# Altium PCB PCB2.PcbDoc
Units mil, origin at the board's own origin, x right, y up, seen from the top; angles counter-clockwise.
Board outline 6000 x 4000 mil, 2 copper layers (Top Layer, Bottom Layer); 39 components, 38 nets, 173 pads, 0 vias.
Unrouted connection lines stored in the file: 50.
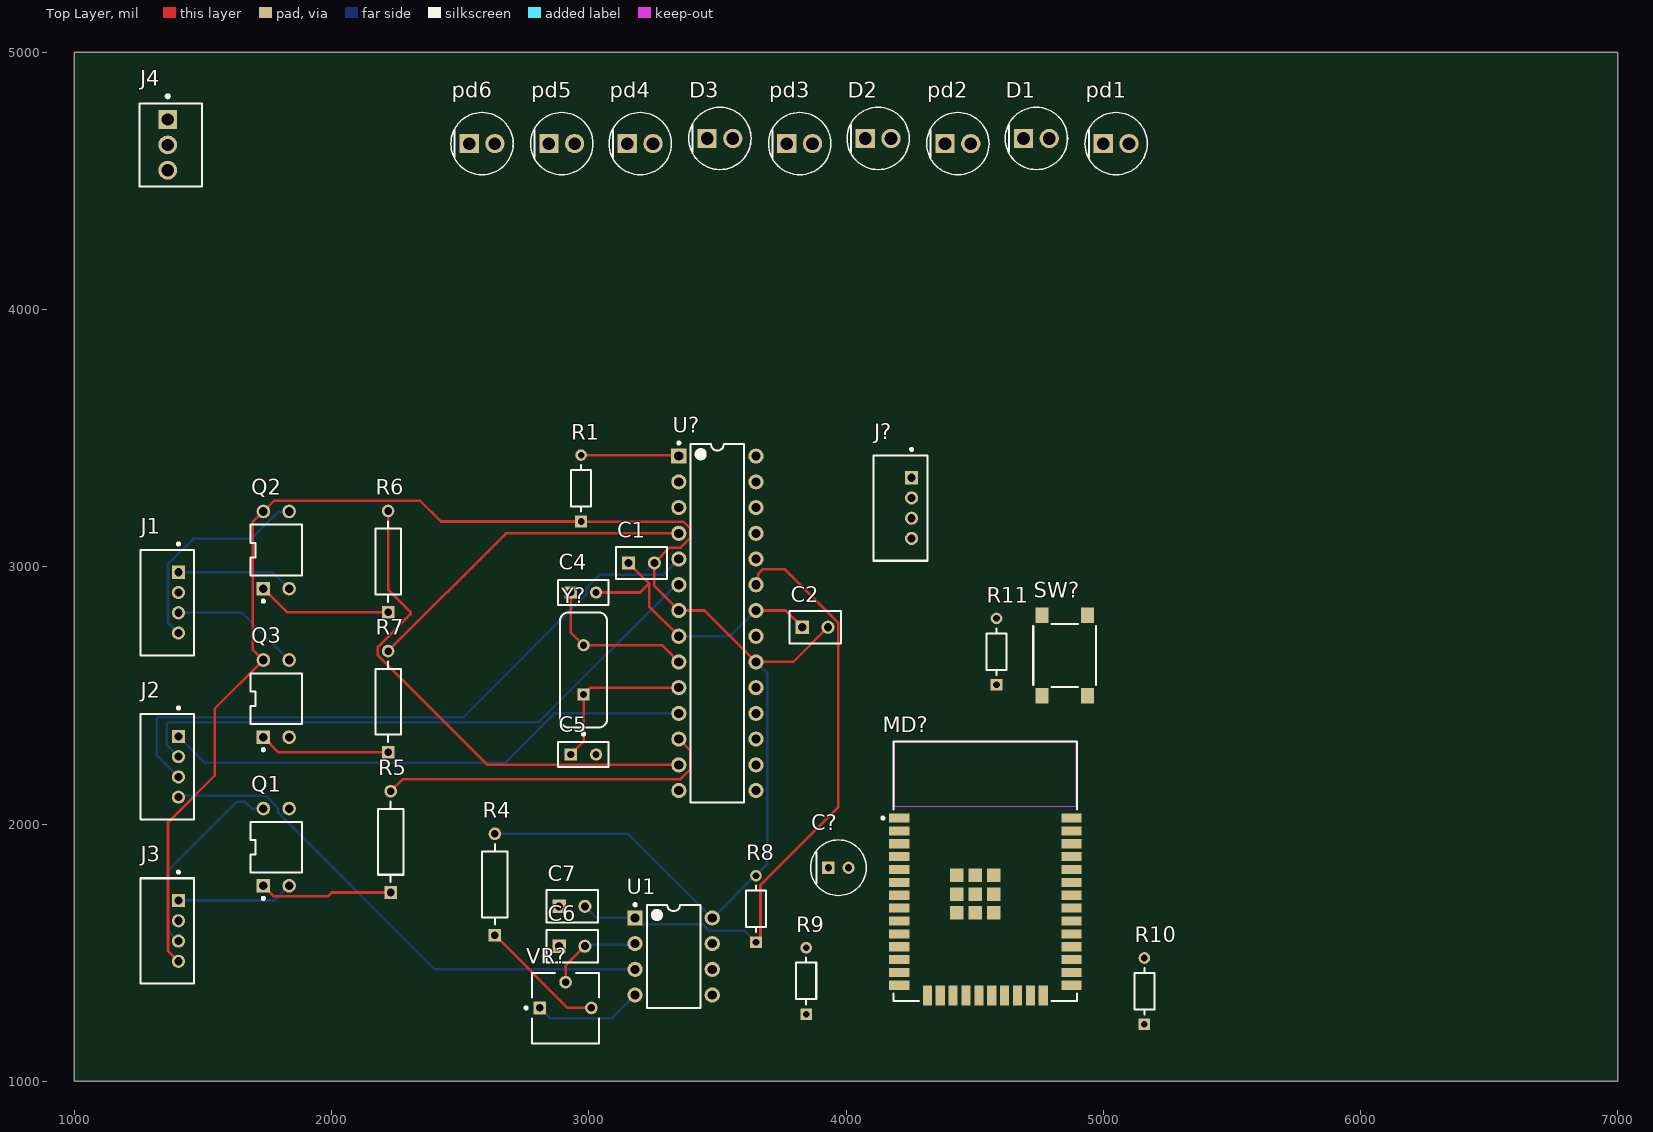
[diagram p0: Top Layer view]
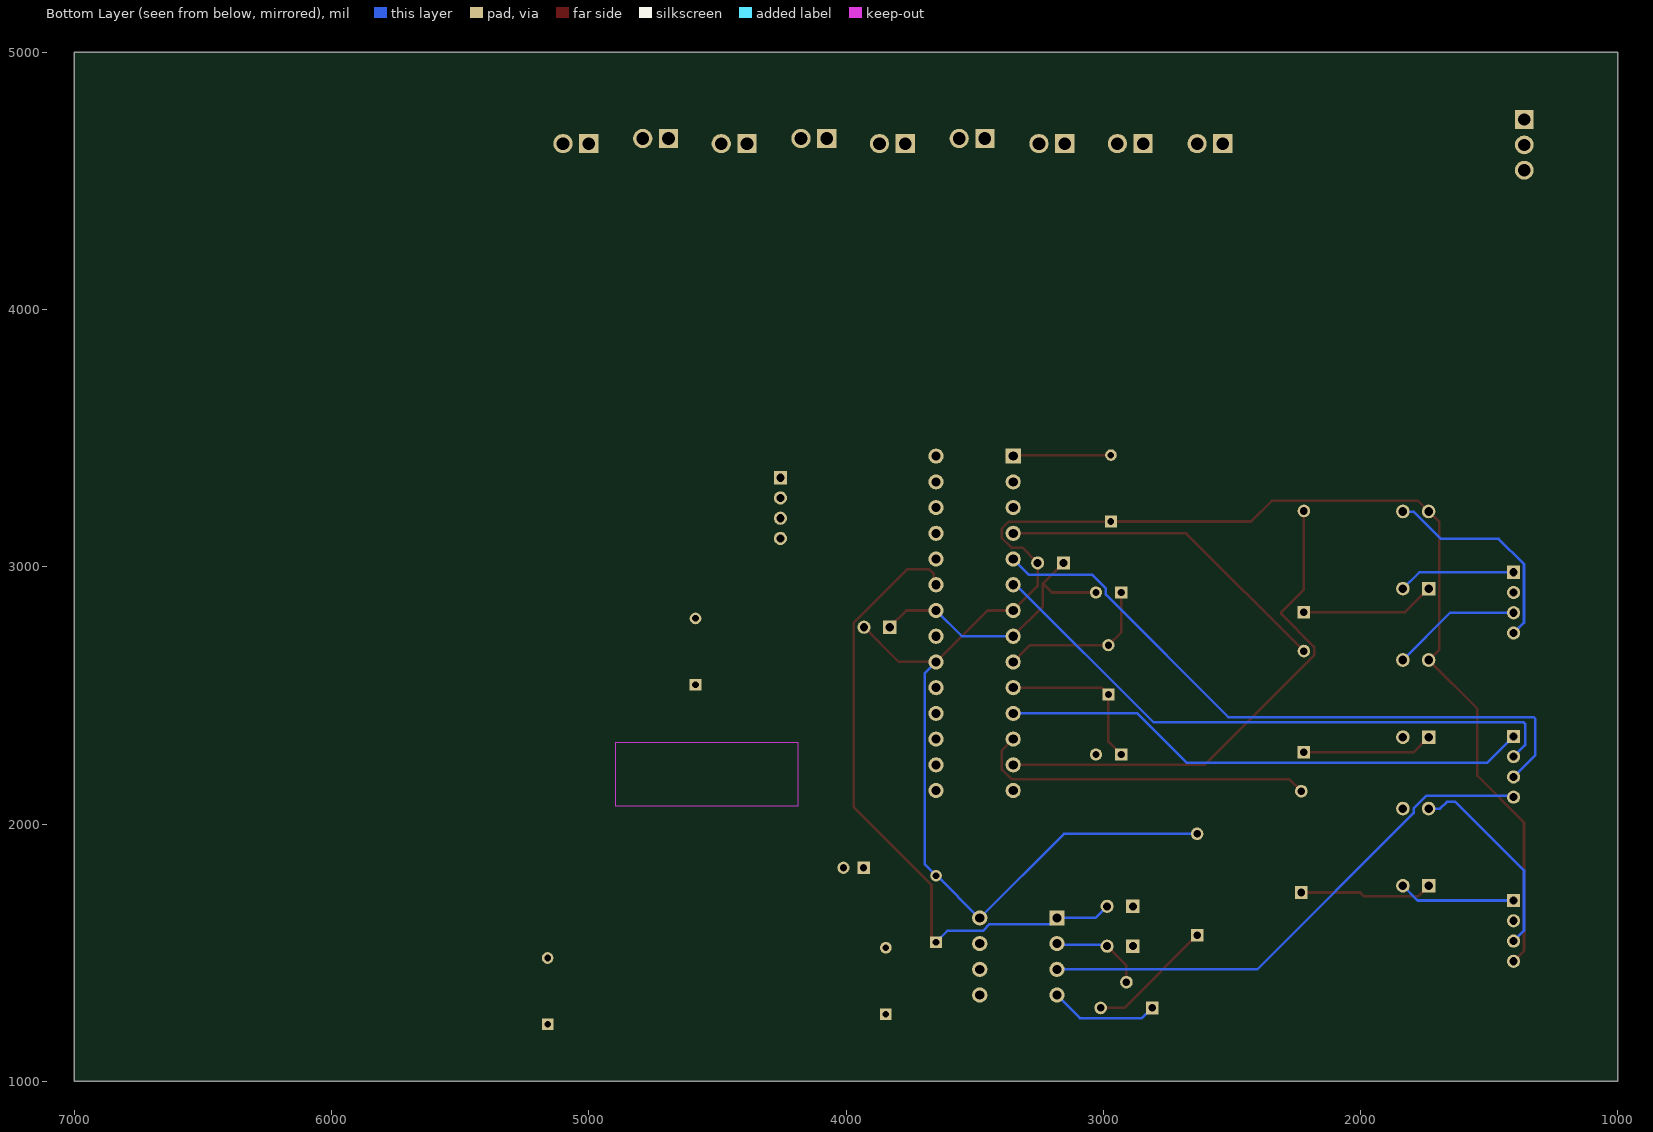
[diagram p1: Bottom Layer view, seen from below]

## Layer stack, top to bottom
Top Solder: solder mask 0.4, Solder Resist, Dk 3.5
Top Layer: signal copper 1.4
Dielectric 1: dielectric 12.6, FR-4, Dk 4.8
Bottom Layer: signal copper 1.4
Bottom Solder: solder mask 0.4, Solder Resist, Dk 3.5

## Board outline
1000,1000 7000,1000 7000,5000 1000,5000

## Design rules (kind name [scope] priority, off if disabled: settings)
Clearance [All] p1: gap=10 ignorepadtopadclearanceinfootprint=FALSE
PolygonConnect [All] p1: connectstyle=Relief reliefconductorwidth=10 reliefentries=4 polygonreliefangle="90 Angle" airgapwidth=10
RoutingVias [All] p1: holewidth=28 width=50 viastyle="Through Hole" minholewidth=28 minwidth=50 maxholewidth=28 maxwidth=50
SolderMaskExpansion [All] p1: expansion=4 istentingtop=FALSE
Width [All] p1: maxlimit=10 minlimit=10 preferedwidth=10
30 further rules are at their usual default settings.

## Classes and differential pairs
component class esp32: C? J? MD? R9 R10 R11 SW?
component class atmega: C1 C2 C4 C5 C6 C7 J1 J2 J3 Q1 Q2 Q3 R1 R4 R5 R6 R7 R8 U1 U? VR? Y?
component class ir: D1 D2 D3 J4 pd1 pd2 pd3 pd4 pd5 pd6

## Components (designator, comment, footprint, x,y, rotation, side; value= is the part's Value field where it differs from the comment)
C1 "C320C104K5R5TA" CAPR51-254-508X318X736 3205,3015 r0 top
C2 "C320C104K5R5TA" CAPR51-254-508X318X736 3880,2765 r0 top
C4 "RDE5C1H220J0S1H03A" FP-RDE0P1-MFG 2979.21,2900 r0 top
C5 "RDE5C1H220J0S1H03A" FP-RDE0P1-MFG 2979.21,2270 r0 top
C6 "C320C104K5R5TA" CAPR51-254-508X318X736 2935,1525 r0 top
C7 "C320C104K5R5TA" CAPR51-254-508X318X736 2935,1680 r0 top
C? "ECA1JM100" FP-RAD-TH-D_5_0_5-L_11_1-MFG 3970.63,1830 r0 top
D1 "LTL2P3KGKNN" FP-LTL2P3KGKNN-MFG 4740,4665 r0 top
D2 "LTL2P3KGKNN" FP-LTL2P3KGKNN-MFG 4125,4665 r0 top
D3 "LTL2P3KGKNN" FP-LTL2P3KGKNN-MFG 3510,4665 r0 top
J1 "DF3A-4P-2DSA" FP-DF3A-4P-2DSA-MFG 1361.69,2860.63 r90 top
J2 "DF3A-4P-2DSA" FP-DF3A-4P-2DSA-MFG 1361.69,2222.5 r90 top
J3 "DF3A-4P-2DSA" FP-DF3A-4P-2DSA-MFG 1361.69,1584.37 r90 top
J4 "22-04-1031" FP-22-04-1031-MFG 1375,4640 r90 top
J? "DF3A-4P-2DSA" FP-DF3A-4P-2DSA-MFG 4211.69,3228.11 r90 top
MD? "ESP32-WROOM-32" FP-ESP32-WROOM-32-MFG 4541.61,1815.94 r0 top
pd1 "LTL2P3KGKNN" FP-LTL2P3KGKNN-MFG 5050,4645 r0 top
pd2 "LTL2P3KGKNN" FP-LTL2P3KGKNN-MFG 4435,4645 r0 top
pd3 "LTL2P3KGKNN" FP-LTL2P3KGKNN-MFG 3820,4645 r0 top
pd4 "LTL2P3KGKNN" FP-LTL2P3KGKNN-MFG 3200,4645 r0 top
pd5 "LTL2P3KGKNN" FP-LTL2P3KGKNN-MFG 2895,4645 r0 top
pd6 "LTL2P3KGKNN" FP-LTL2P3KGKNN-MFG 2585,4645 r0 top
Q1 "PC817X1J000F" FP-PC817X1J000F-MFG 1785,1910 r90 top
Q2 "PC817X1J000F" FP-PC817X1J000F-MFG 1785,3065 r90 top
Q3 "PC817X1J000F" FP-PC817X1J000F-MFG 1785,2487.5 r90 top
R1 "CF18JT10K0" FP-CF18-MFG 2970,3305 r90 top value=10kΩ
R4 "MRS25000C1001FCT00" FP-MRS25-MFG 2635,1765 r90 top
R5 "MRS25000C1001FCT00" FP-MRS25-MFG 2230,1930.67 r90 top
R6 "MRS25000C1001FCT00" FP-MRS25-MFG 2220,3020.12 r90 top
R7 "MRS25000C1001FCT00" FP-MRS25-MFG 2220,2475.39 r90 top
R8 "CF18JT10K0" FP-CF18-MFG 3650,1670 r90 top value=10kΩ
R9 "CF18JT10K0" FP-CF18-MFG 3845,1390 r90 top value=10kΩ
R10 "CF18JT10K0" FP-CF18-MFG 5160,1350 r90 top value=10kΩ
R11 "CF18JT10K0" FP-CF18-MFG 4585,2670 r90 top value=10kΩ
SW? "430152043836" WS-TASV_L6W6H4.3_4301x20438x6 4850,2655 r90 top
U1 "LM393N" P0008A 3330,1485 r0 top
U? "ATmega328-PU" 28P3 3500,2780 r0 top
VR? "3362P-1-104LF" BOUR-3362P 2910,1283.62 r0 top
Y? "FOXSLF/160-20" FOX-FOXSLF160-20 2980,2598.94 r90 top

## Footprints (in the part's own frame and the unit in brackets; to place one, negate y for a bottom-side part, rotate by r counter-clockwise, add the part's x,y. Pads: shape width x height; smd on the part's side, far side on the other; paste and mask are expansions set on the pad)
28P3 [mm] "28-Pin Plastic Dual In-Line Package (PDIP)"
  rect 1.5x1.5 hole 0.9: 1(-3.81,16.51)
  round 1.5 hole 0.9: 2(-3.81,13.97) 3(-3.81,11.43) 4(-3.81,8.89) 5(-3.81,6.35) 6(-3.81,3.81) 7(-3.81,1.27) 8(-3.81,-1.27) 9(-3.81,-3.81) 10(-3.81,-6.35) 11(-3.81,-8.89) 12(-3.81,-11.43) 13(-3.81,-13.97) 14(-3.81,-16.51) 15(3.81,-16.51) 16(3.81,-13.97) 17(3.81,-11.43) 18(3.81,-8.89) 19(3.81,-6.35) 20(3.81,-3.81) 21(3.81,-1.27) 22(3.81,1.27) 23(3.81,3.81) 24(3.81,6.35) 25(3.81,8.89) 26(3.81,11.43) 27(3.81,13.97) 28(3.81,16.51)
  silkscreen extent -3.93,-17.7 2.65,17.93, body extent -3.6,-17.65 3.6,17.65, height 4.58
BOUR-3362P [mm] "THD, 3-Leads, Body 6.6x6.99mm, Pitch 2.54mm"
  rect 1.25x1.25 hole 0.75: 1(-2.54,0.035)
  round 1.25 hole 0.75: 2(0,2.575) 3(2.54,0.035)
  silkscreen extent -4.02,-3.49 3.3,3.5, body extent -3.3,-3.49 3.3,3.49, height 4.95
CAPR51-254-508X318X736 [mm] "THD, 2-Leads, Body 5.08x3.18mm"
  rect 1.3x1.3 hole 0.8: 1(-1.27,0)
  round 1.3 hole 0.8: 2(1.27,0)
  silkscreen extent -2.54,-1.59 2.54,1.59, body extent -2.54,-1.59 2.54,1.59, height 7.36
FOX-FOXSLF160-20 [mm] "THD, 2-Leads, Body 11.35x4.65mm"
  rect 1.2x1.2 hole 0.7: 1(-2.44,0)
  round 1.2 hole 0.7: 2(2.44,0)
  silkscreen extent -6.45,-2.32 5.68,2.32, body extent -5.67,-2.32 5.68,2.33, height 3.6
FP-22-04-1031-MFG [mm]
  rect 1.85x1.85 hole 1.2 paste-2539.97 mask+0: 1(2.5,0.3)
  round 1.85 hole 1.2 paste-2539.97 mask+0: 2(0,0.3) 3(-2.5,0.3)
  silkscreen extent -4.1,-3.1 4.95,3.1, body extent -4.2,-3.2 4.2,3.2, height 0.25
FP-CF18-MFG [mm]
  rect 1.15x1.15 hole 0.65 paste-2539.97 mask+0: 1(-3.28,0)
  round 1.15 hole 0.65 paste-2539.97 mask+0: 2(3.28,0)
  silkscreen extent -2.3,-1 2.3,1, body extent -3.96,-1.1 3.96,1.1, height 0.25
FP-DF3A-4P-2DSA-MFG [mm]
  rect 1.3x1.3 hole 0.8 paste-2539.97 mask+0: 1(3,-1.1)
  round 1.3 hole 0.8 paste-2539.97 mask+0: 2(1,-1.1) 3(-1,-1.1) 4(-3,-1.1)
  silkscreen extent -5.2,-2.65 5.92,2.65, body extent -5.3,-2.75 5.3,2.75, height 0.25
FP-ESP32-WROOM-32-MFG [mm]
  rect 2x0.9 smd paste+0 mask+0: 1(-8.5,5.26) 2(-8.5,3.99) 3(-8.5,2.72) 4(-8.5,1.45) 5(-8.5,0.18) 6(-8.5,-1.09) 7(-8.5,-2.36) 8(-8.5,-3.63) 9(-8.5,-4.9) 10(-8.5,-6.17) 11(-8.5,-7.44) 12(-8.5,-8.71) 13(-8.5,-9.98) 14(-8.5,-11.25) 25(8.5,-11.25) 26(8.5,-9.98) 27(8.5,-8.71) 28(8.5,-7.44) 29(8.5,-6.17) 30(8.5,-4.9) 31(8.5,-3.63) 32(8.5,-2.36) 33(8.5,-1.09) 34(8.5,0.18) 35(8.5,1.45) 36(8.5,2.72) 37(8.5,3.99) 38(8.5,5.26)
  rect 0.9x2 smd paste+0 mask+0: 15(-5.715,-12.25) 16(-4.445,-12.25) 17(-3.175,-12.25) 18(-1.905,-12.25) 19(-0.635,-12.25) 20(0.635,-12.25) 21(1.905,-12.25) 22(3.175,-12.25) 23(4.445,-12.25) 24(5.715,-12.25)
  rect 1.33x1.33 smd paste+0 mask+0: 39(-2.835,-4.075) 39(-2.835,-2.24) 39(-2.835,-0.405) 39(-1,-4.075) 39(-1,-2.24) 39(-1,-0.405) 39(0.835,-4.075) 39(0.835,-2.24) 39(0.835,-0.405)
  Keep-Out Layer region: -9,6.45 9,6.45 9,12.75 -9,12.75
  Keep-Out Layer region: -9,6.45 9,6.45 9,12.75 -9,12.75
  silkscreen extent -10.25,-12.8 9.05,12.8, body extent -9.6,-13.35 9.6,12.9, height 0.25
FP-LTL2P3KGKNN-MFG [mm]
  rect 1.9x1.9 hole 1.25 paste-2539.97 mask+0: 1(-1.27,0)
  round 1.9 hole 1.25 paste-2539.97 mask+0: 2(1.27,0)
  silkscreen extent -3.08,-3.08 3.08,3.08, body extent -3.17,-3.17 3.17,3.17, height 0.25
FP-MRS25-MFG [mm]
  rect 1.25x1.25 hole 0.75 paste-2539.97 mask+0: 1(-5,0)
  round 1.25 hole 0.75 paste-2539.97 mask+0: 2(5,0)
  silkscreen extent -3.98,-1.25 3.98,1.25, body extent -5.72,-1.35 5.72,1.35, height 0.25
FP-PC817X1J000F-MFG [mm]
  rect 1.35x1.35 hole 0.85 paste-2539.97 mask+0: 1(-3.81,1.27)
  round 1.35 hole 0.85 paste-2539.97 mask+0: 2(-3.81,-1.27) 3(3.81,-1.27) 4(3.81,1.27)
  silkscreen extent -5.17,-2.54 2.5,2.54, body extent -4.58,-2.64 4.58,2.64, height 0.25
FP-RAD-TH-D_5_0_5-L_11_1-MFG [mm]
  rect 1.2x1.2 hole 0.7 paste-2539.97 mask+0: 1(-1,0)
  round 1.2 hole 0.7 paste-2539.97 mask+0: 2(1,0)
  silkscreen extent -2.75,-2.75 2.75,2.75, body extent -2.85,-2.85 2.85,2.85, height 0.25
FP-RDE0P1-MFG [mm]
  rect 1.2x1.2 hole 0.7 paste-2539.97 mask+0: 1(-1.25,0)
  round 1.2 hole 0.7 paste-2539.97 mask+0: 2(1.25,0)
  silkscreen extent -2.5,-1.25 2.5,1.25, body extent -2.6,-1.35 2.6,1.35, height 0.25
P0008A [mm] "DIP, 8-Leads, Body 10.15x6.6mm, Pitch 2.54mm"
  rect 1.5x1.5 hole 0.9: 1(-3.81,3.81)
  round 1.5 hole 0.9: 2(-3.81,1.27) 3(-3.81,-1.27) 4(-3.81,-3.81) 5(3.81,-3.81) 6(3.81,-1.27) 7(3.81,1.27) 8(3.81,3.81)
  silkscreen extent -3.93,-5.1 2.65,5.23, body extent -3.95,-5.07 3.95,5.07, height 5.08
WS-TASV_L6W6H4.3_4301x20438x6 [mm] "SMD Tact Switch, body 6x6mm"
  rect 1.55x1.3 smd: A1(-3.975,2.25) A2(3.975,2.25) B1(-3.975,-2.25) B2(3.975,-2.25)
  silkscreen extent -3.1,-3.1 3.1,3.1, body extent -4.5,-3.1 4.5,3.1, height 4.3

## Part data
C1 C2 C6 C7: library part CMP-1664-00004-1, "Radial Leaded Multilayer Ceramic Capacitor, 0.1 uF, +/- 10%, 50 V, -55 to 125 degC, 2-Pin THD, RoHS, Tape and Reel", Case\Package=SOT-23-5, Dropout Voltage="260 mV", Max Input Voltage="8 V", Max Operating Temperature="85 degC", Max Power Dissipation="250 mW", Min Operating Temperature="-40 degC", Output Current="150 mA", Output Voltage="5 V", Package Quantity=3000, ComponentLink1Description="Manufacturer URL", ComponentLink1URL=http://www.kemet.com/, ComponentLink2Description=Datasheet, ComponentLink2URL=http://www.kemet.com/docfinder?Partnumber=C320C104K5R5TA, DatasheetVersion=Dec-15, Height="1.3 mm", Length="3 mm", Mount="Surface Mount", Outputs=1, PackageDescription="2-Pin Through Hole Device, Body 5.08 x 3.18 mm, Pitch 2.54 mm", PackageReference=CAPR51-254-508X318X736, Packaging="Tape and Reel", Pins=5, Radiation Hardening=No, RoHSCompliant=true, Width="1.8 mm"
C4 C5: library part CMP-06035-010311-1, "Ceramic Capacitor 22pF ±5% 50V C0G Radial", Capacitance=22pF, Case/Package=Radial, Dielectric=C0G, Max Operating Temperature=125°C, Min Operating Temperature=-55°C, Package Quantity=1, Resistor Type=Ceramic, Tolerance=5%, Voltage Rating=50V, Height=3.5mm, Height - Seated (Max)=0.236inch, Lead Diameter=0.5mm, Lead Pitch=0.098inch, Length=0.197inch, Mount="Through Hole", Packaging="Tape and Reel", Termination=Radial, Voltage Rating (DC)=50V, Width=0.098inch
C?: library part CMP-05427-001517-1, "Aluminum Electrolytic Capacitors (Radial Lead Type) 10uF ±20% 63V", Capacitance=10uF, Case/Package=Radial, Dielectric Material=Aluminium, Leakage Current=3uA, Max Operating Temperature=85°C, Min Operating Temperature=-40°C, Package Quantity=200, Ripple Current=70mA, Tolerance=20%, Voltage=63V, Construction=RADIAL, Diameter=5mm, Dissipation Factor=0.11%, Height=11mm, Height - Seated (Max)=0.472inch, Lead Diameter=0.5mm, Lead Free="Lead Free", Lead Pitch=2mm, Lead/Base Style=Straight, Length=11mm, Life (Hours)=2000Hour, Mount="Through Hole", Packaging=Bulk, Radiation Hardening=No, REACH SVHC="No SVHC", RoHS Compliant=Yes, Series=M, Termination=Radial, Voltage Rating=63V, Voltage Rating (DC)=63V, Width=5mm
D1 D2 D3 pd1 pd2 pd3 pd4 pd5 pd6: library part CMP-22017-000002-1, "LED GREEN CLEAR T-1 3/4 T/H", Colour=Green, Forward Current=20mA, Forward Voltage=2.1V, Manufacturer=Lite-On, Package=0, Power Dissipation=75mW, Reverse Voltage=5V, Temperature="-40°C to +100°C", Temperature Range High=+100°C, Temperature Range Low=-40°C, Automotive=No, Category=Diode, ComponentLink2Description=Datasheet, ComponentLink2URL=https://optoelectronics.liteon.com/upload/download/DS20-2000-193/LTL2P3KGKNN.pdf, Device Class L1=Optoelectronics, Device Class L2=LEDs, Device Class L3=unset, Digikey Description="LED GREEN CLEAR T-1 3/4 T/H", Height=9.95mm, Lead Free=Yes, Led Orientation=Straight, Luminous Intensity=980mcd, Manufacturer Part Number=LTL2P3KGKNN, Mouser Description="LED Uni-Color Green 575nm 2-Pin T-1 3/4", Octopart=https://octopart.com/ltl2p3kgknn-lite-on-550036, Peak Emmision Wavelength=575nm, RoHS=TRUE, Viewing Angle=22°, Wavelength=572nm
J1 J2 J3 J?: library part CMP-11610-000039-1, "CONN HEADER VERT 4POS 2MM", Color=Black, Current Rating=3A, Insulation Resistance=1GR, Package Quantity=100, Voltage Rating=250V, Connector Type="Male Pin", Contact Gender=Male, Contact Material=Brass, Contact Plating=Tin, Contact Type="Male Pin", Gender=Male, Height=5mm, Housing Color=Black, Housing Material=Polyamide, Insulation Material=Nylon, Lead Free="Lead Free", Length=10mm, Mount="Through Hole", Number of Contacts=4, Number of Positions=4, Number of Rows=1, Orientation=Straight, Packaging=Bulk, Pitch=2mm, Radiation Hardening=No, RoHS Compliant=Yes, Series=DF3, Termination="Through Hole"
J4: library part CMP-04776-000410-1, "CONN HEADER VERT 3POS 2.5MM", Color=Natural, Contact Resistance=20mR, Current Rating=3A, Flammability Rating="UL94 V-0", Insulation Resistance=1GR, Max Operating Temperature=105°C, Max Voltage Rating (DC)=250.25kV, Min Operating Temperature=-40°C, Package Quantity=1, Voltage Rating=250V, Connector Type="Male Pin", Contact Gender=Male, Contact Material=Brass, Contact Mating Length=0.295inch, Contact Plating=Tin, Contact Type="Male Pin", Fastening Type=Friction, Gender=Male, Glow Wire Compliant=Non-compliant, Halogen Free="Low Halogen", Hole Diameter=1.19mm, Housing Color=Natural, Housing Material=Nylon, Lead Free="Lead Free", Lead Pitch=2.5mm, Mount="Through Hole", Number of Circuits=3, Number of Contacts=3, Number of Poles=3, Number of Positions=3, Number of Rows=1, Orientation=Straight, Packaging=Bulk, Pitch=2.5mm, Radiation Hardening=No, Series=KK, Termination=Solder, Voltage Rating (AC)=250V, Voltage Rating (DC)=250V, Working Voltage=250V
MD?: library part CMP-194065-000008-1, "RX TXRX MOD WIFI SURFACE MOUNT", Case/Package=SMD/SMT, Frequency=2.5GHz, Max Operating Temperature=85°C, Min Operating Temperature=-40°C, Operating Supply Voltage=3.6V, Package Quantity=550, Data Rate=150Mbps, Mount="Surface Mount", Packaging="Cut Tape", Sensitivity=-98dBm, Weight=0.088185oz
Q1 Q2 Q3: library part CMP-65434-000003-1, "OPTOISOLATOR 5KV TRANS 4DIP", Case/Package=DIP, Collector Emitter Breakdown Voltage=80V, Collector Emitter Saturation Voltage=200mV, Current Transfer Ratio=600%, Forward Current=50mA, Forward Voltage=1.4V, Input Current=20mA, Isolation Voltage=5kV, Max Operating Temperature=100°C, Max Power Dissipation=200mW, Min Operating Temperature=-30°C, Package Quantity=2000, Reverse Breakdown Voltage=6V, Collector Emitter Voltage (VCEO)=80V, Fall Time=18000ns, Max Collector Current=50mA, Max Input Current=50mA, Mount="Through Hole", Number of Channels=1, Number of Elements=1, Number of Pins=4, Output Current per Channel=50mA, Output Voltage=80V, Packaging=Sleeve, Power Dissipation=200mW, Radiation Hardening=No, Rise Time=18000ns
R1 R8 R9 R10 R11: library part CMP-26528-000002-1, "RES 10K OHM 1/8W 5% CF AXIAL", Manufacturer="Stackpole Electronics", Package=CF18, Power Rating=0.125W, Resistance=10kΩ, Temperature="-55°C to +155°C", Temperature Coefficient=0-500ppm/°C, Temperature Range High=+155°C, Temperature Range Low=-55°C, Tolerance=5%, Voltage Rating=250V, Automotive=No, Category=Res, ComponentLink2Description=Datasheet, ComponentLink2URL=http://www.seielect.com/Catalog/SEI-CF_CFM.pdf, Composition="Carbon Film", Device Class L1="Passive Components", Device Class L2=Resistors, Device Class L3="Through-Hole Resistors", Digikey Description="RES 10K OHM 1/8W 5% CF AXIAL", Height=2mm, Ipc Land Pattern Name=RESAD656W65L360D200, Lead Free=Yes, Manufacturer Part Number=CF18JT10K0, Octopart=https://octopart.com/cf18jt10k0-stackpole+electronics-19205642, RoHS=TRUE, Series=CF
R4 R5 R6 R7: library part CMP-02408-000051-1, "RES 1K OHM 0.6W 1% AXIAL", Case/Package=Axial, Max Operating Temperature=155°C, Max Power Dissipation=600mW, Min Operating Temperature=-55°C, Package Quantity=5000, Resistance=1kR, Resistance Tolerance=1%, Resistor Type="Metal Film", Temperature Coefficient=50ppm/°C, Voltage Rating=350V, Construction=Cylindrical, Contact Plating=Tin, Diameter=2.5mm, Lead Diameter=0.6mm, Lead Free="Lead Free", Length=6.5mm, Military Standard=Not, Mount="Through Hole", Number of Pins=2, Number of Terminations=2, Packaging="Tape and Reel", Power Rating=600mW, Radiation Hardening=No, RoHS Compliant=Yes, Series=MRS25, Technology="THIN FILM", Termination=Axial, Tolerance=1%, Voltage Rating (DC)=350V, Weight=0.00776oz, Width=2.5mm
SW?: library part CMP-1452-00002-2, Color=Orange, Contact Current Rating=50mA, Insulation Resistance=100MΩ, Max Operating Temperature=85°C, Min Operating Temperature=-40°C, Voltage Rating=12V, Actuator Length=900µm, Actuator Material="Liquid Crystal Polymer, Polymer", Contact Material="Stainless Steel, Steel", Contact Plating=Silver, Current Rating=50mA, Diameter=3.5mm, Height=4.3mm, Illumination Type="Illuminated, Non-Illuminated", Length=6.2mm, Mechanical Life=200kcycles, Mount="Surface Mount", NexarPartId=22861785, Packaging="Tape and Reel", REACH SVHC="No SVHC", RoHS=Compliant, Switch Function=Off-Mom, Switch Travel=250µm, Termination="Gull Wing", Throw Configuration=SPST, Width=6.2mm
U1: library part CMP-0055-00119-3, "Low Power Low Offset Voltage Dual Comparator, 8-pin MDIP", Manufacturer="Texas Instruments", Package Reference=P0008A, PackageTopMarking=NSUZXYTTE#*LM*393N, PowerWise=N, Code_JEDEC=MS-001-BA, ComponentLink1Description="Datasheet URL", ComponentLink1URL=http://www.ti.com/general/docs/lit/getliterature.tsp?genericPartNumber=LM393-N&fileType=pdf, CompType=Amplifiers, PackageDescription="MDIP, .365 x .250 x .130in, 8 Lead, .100in Pitch", PinCount=8, RoHS=N
U?: library part CMP-0095-00015-2, "8-bit AVR Microcontroller, 32KB Flash, 1KB EEPROM, 2KB SRAM, 28-pin PDIP, Industrial Grade (-40°C to 85°C)", ComponentLink1Description="Manufacturer URL", ComponentLink1URL=http://www.atmel.com/, ComponentLink2Description="ATmega48A/48PA/88A/88PA/168A/168PA/328/328P Datasheet", ComponentLink2URL=http://www.atmel.com/dyn/resources/prod_documents/8271.pdf, ComponentLink3Description="ATmega48A/48PA/88A/88PA/168A/168PA/328/328P Summary", ComponentLink3URL=http://www.atmel.com/dyn/resources/prod_documents/8271S.pdf, DatasheetVersion="revD, May-2011", PackageDescription="28-lead (0.300\"/7.62mm Wide) Plastic Dual Inline Package (PDIP)", PackageReference=28P3, PackageVersion="revB, Sep-2001", RevisionNote="DatasheetVersion updated. URLs added."
VR?: library part CMP-1747-00003-1, "Square Trimpot(R) Trimming Potentiometer, 100 KOhm, 300 V, -55 to 125 degC, 3-Pin THD, RoHS, Tube", Case\Package=Axial, Max Operating Temperature="155 degC", Min Operating Temperature="-55 degC", Package Quantity=200, Power Rating="250 mW", Resistance="1 mohm", Tolerance=1%, Voltage Rating="250 V", ComponentLink1Description="Manufacturer URL", ComponentLink1URL=http://www.bourns.com/, ComponentLink2Description=Datasheet, ComponentLink2URL=http://www.bourns.com/docs/Product-Datasheets/3362.pdf, DatasheetVersion=May-16, Length="0.248 inch", Mount="Through Hole", PackageDescription="3-Pin Through Hole Device, Body 6.6 x 6.99 mm, Pitch 2.54 mm", PackageReference=3326P, Packaging=Bulk, RoHSCompliant=true
Y?: library part CMP-1749-00003-1, "Resistance Weld Thru-Hole Crystal, 16 MHz, -20 to 70 degC, 2-Pin THD, RoHS, Bulk", Case\Package=Axial, Max Operating Temperature="155 degC", Min Operating Temperature="-55 degC", Package Quantity=200, Power Rating="250 mW", Resistance="221 kohm", Tolerance=1%, Voltage Rating="250 V", ComponentLink1Description="Manufacturer URL", ComponentLink1URL=http://www.foxonline.com/, ComponentLink2Description=Datasheet, ComponentLink2URL=http://www.foxonline.com/pdfs/hc49slf.pdf, DatasheetVersion=Mar-15, Length="0.248 inch", Mount="Through Hole", PackageDescription="2-Pin Through Hole Device, Body 11.35 x 4.65 mm", PackageReference=FOXSLF160-20, Packaging=Bulk, RoHSCompliant=true

## Nets (pads, with @x,y where several pads share a name; then routed paths per layer and width w, separated by ;. In a path a pad name is that pad's centre, name@x,y a point inside that pad or via, vN(x,y) a via of type N, cw(c..) or ccw(c..) an arc to the next point about the centre after c; other vN are vias at no path point)
+3.3v: J3.3 Q1.4 | length 782.9
  Bottom Layer w10: J3.3 1364.41,1585.59 1364.41,1819.41 1630.86,2085.86 1664.16,2085.86 1690.02,2060 Q1.4
+5: C1.2 C2.2 J3.4 Q2.4 Q3.4 R1.1 R4.2 R8.2 U1.8 U?.7 U?.20 | length 6920.7
  Top Layer w10: J3.4 1364.41,1506.85 1364.41,2006.4 1545.58,2187.56 1545.58,2448.08 Q3.4 1693.43,2679.07 1693.43,3173.43 Q2.4 1776.57,3256.57 2344.72,3256.57 2425.43,3175.87 R1.1 2970.87,3175 3367.97,3175 3394.53,3148.44 3394.53,3111.56 3357.5,3074.53 3314.53,3074.53 C1.2 3255,2925 U?.7 3450,2830 U?.20 3795,2630 C2.2
  Bottom Layer w10: R4.2 3153.15,1961.85 U1.8 3482.93,1635 3647.07,1799.13 R8.2 3694.53,1843.66 3694.53,2585.47 U?.20
clock1: C4.1 U?.9 Y?.2 | length 622.6
  Top Layer w10: C4.1 2930,2745 Y?.2 3285,2695 U?.9
clock2: C5.1 U?.10 Y?.1 | length 634.8
  Top Layer w10: C5.1 2980,2320 Y?.1 3007.13,2530 U?.10
DHT11: J2.1 U?.11 | length 2066.3
  Bottom Layer w10: J2.1 1506.67,2238.94 2675.89,2238.94 2866.95,2430 U?.11
espswitch: R5.2 U?.12 | length 1336.2
  Top Layer w10: R5.2 2277.01,2174.53 3357.5,2174.53 3394.53,2211.56 3394.53,2285.47 U?.12
GND: C1.1 C2.1 C4.2 C5.2 C6.1 C7.1 C?.1 J1.1 J3.1 J?.2 MD?.1 MD?.15 MD?.38 MD?.39 Q1.2 Q2.2 Q3.2 SW?.B1 SW?.B2 U1.4 U?.8 U?.22 VR?.1 | length 2468.9
  Top Layer w10: C4.2 3200,2900 3235,2935 ; C1.1 3235,2935 ; U?.8 3235,2845 3235,2935 ; U?.22 3765,2830 C2.1
  Bottom Layer w10: J3.1 1777.48,1702.48 Q1.2 ; J1.1 1771.26,2978.74 Q2.2 ; VR?.1 2849.61,1245.39 3090.39,1245.39 U1.4 ; U?.8 3550,2730 U?.22
ir: C7.2 R8.1 U1.1 U?.23 | length 2548
  Top Layer w10: R8.1 3667.64,1558.5 3667.64,1763.54 3970.59,2066.5 3970.59,2781.81 3762.4,2990 3675.86,2990 3659.39,2973.53 3659.39,2939.39 U?.23
  Bottom Layer w10: C7.2 3030,1635 U1.1 3204.53,1610.47 3441.56,1610.47 3467.54,1584.49 3606.38,1584.49 R8.1
irledpower: J1.4 Q2.3 | length 840.1
  Bottom Layer w10: J1.4 1364.41,2783.11 1364.41,3010.54 1462.51,3108.64 1687.44,3108.64 1793.43,3214.63 1834.63,3214.63 Q2.3
irport: J2.4 U1.3 | length 2067.2
  Bottom Layer w10: J2.4 1410.61,2110 1743.8,2110 1793.43,2060.37 1793.43,2042.78 2401.2,1435 U1.3
irswitch: R6.2 U?.13 | length 1996
  Top Layer w10: R6.2 2220,2911.54 2307.5,2824.04 2307.5,2815.76 2180.39,2688.65 2180.39,2655.84 2606.23,2230 2901.54,2230 U?.13
"loadcel switch": R7.2 U?.4 | length 1319.6
  Top Layer w10: R7.2 2677.76,3130 U?.4
loadcell1: J2.3 U?.5 | length 2562.8
  Bottom Layer w10: J2.3 1320,2268.13 1320,2409.14 1325.86,2415 2513.46,2415 2989.8,2891.35 2989.8,2916 3042.11,2968.31 3288.31,2968.31 U?.5
loadcell2: J2.2 U?.6 | length 2359.9
  Bottom Layer w10: J2.2 1360,2306.87 1360,2389.14 1365.86,2395 2803.67,2395 3338.67,2930 U?.6
loadcellpower: J1.3 Q3.3 | length 506.1
  Bottom Layer w10: J1.3 1651.24,2821.26 Q3.3
NetC6_2: C6.2 U1.2 VR?.2 | length 382.6
  Top Layer w10: VR?.2 2910,1450 C6.2 ; U1.2@3180,1522.6 U1.2
  Bottom Layer w10: C6.2 2990,1530 3175,1530 U1.2
NetC?_2: C?.2 J?.1 MD?.2 Q1.3 R9.1 R10.1 R11.1
NetD1_1: D1.1 D2.1 D3.1 J4.1
NetD1_2: D1.2 D2.2 D3.2 J4.2 pd6.1
NetJ4_3: J4.3 pd1.2
NetMD?_3: MD?.3 R9.2
NetMD?_23: MD?.23 SW?.A1
NetMD?_25: MD?.25 R10.2
NetMD?_34: MD?.34 U?.2
NetMD?_35: MD?.35 U?.3
Netpd1_1: pd1.1 pd2.2
Netpd2_1: pd2.1 pd3.2
Netpd3_1: pd3.1 pd4.2
Netpd4_1: pd4.1 pd5.2
Netpd5_1: pd5.1 pd6.2
NetQ1_1: Q1.1 R5.1 | length 518.6
  Top Layer w10: Q1.1 1776.57,1718.43 1985.79,1718.43 2001.18,1733.82 R5.1
NetQ2_1: Q2.1 R6.1 | length 523
  Top Layer w10: Q2.1 1826.73,2823.27 R6.1
NetQ3_1: Q3.1 R7.1 | length 509.4
  Top Layer w10: Q3.1 1793.96,2278.54 R7.1
NetR1_2: R1.2 U?.1 | length 381.7
  Top Layer w10: R1.2 3345.87,3434.13 U?.1
NetR4_1: R4.1 VR?.3 | length 492.3
  Top Layer w10: R4.1 2918.15,1285 VR?.3
NetR11_2: R11.2 SW?.A2
"OLED SCL": J?.4 MD?.36
"OLED SDA": J?.3 MD?.33
pads on no net: J1.2 J3.2 MD?.4 MD?.5 MD?.6 MD?.7 MD?.8 MD?.9 MD?.10 MD?.11 MD?.12 MD?.13 MD?.14 MD?.16 MD?.17 MD?.18 MD?.19 MD?.20 MD?.21 MD?.22 MD?.24 MD?.26 MD?.27 MD?.28 MD?.29 MD?.30 MD?.31 MD?.32 MD?.37 U1.5 U1.6 U1.7 U?.14 U?.15 U?.16 U?.17 U?.18 U?.19 U?.21 U?.24 U?.25 U?.26 U?.27 U?.28